# EAGLE board DC30_Cnet_Cow-A-Bunga_SAO (EAGLE 9.6.2)
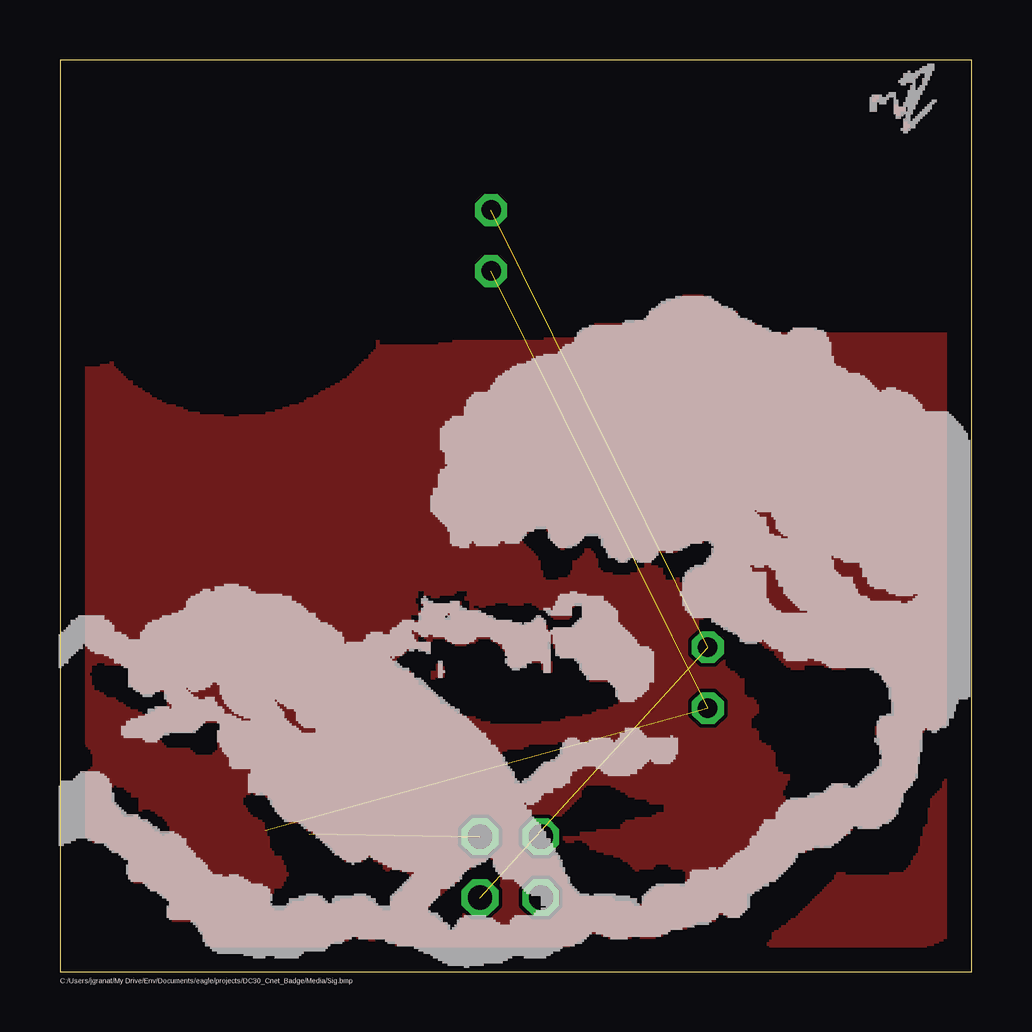
[diagram p0: board, top side]
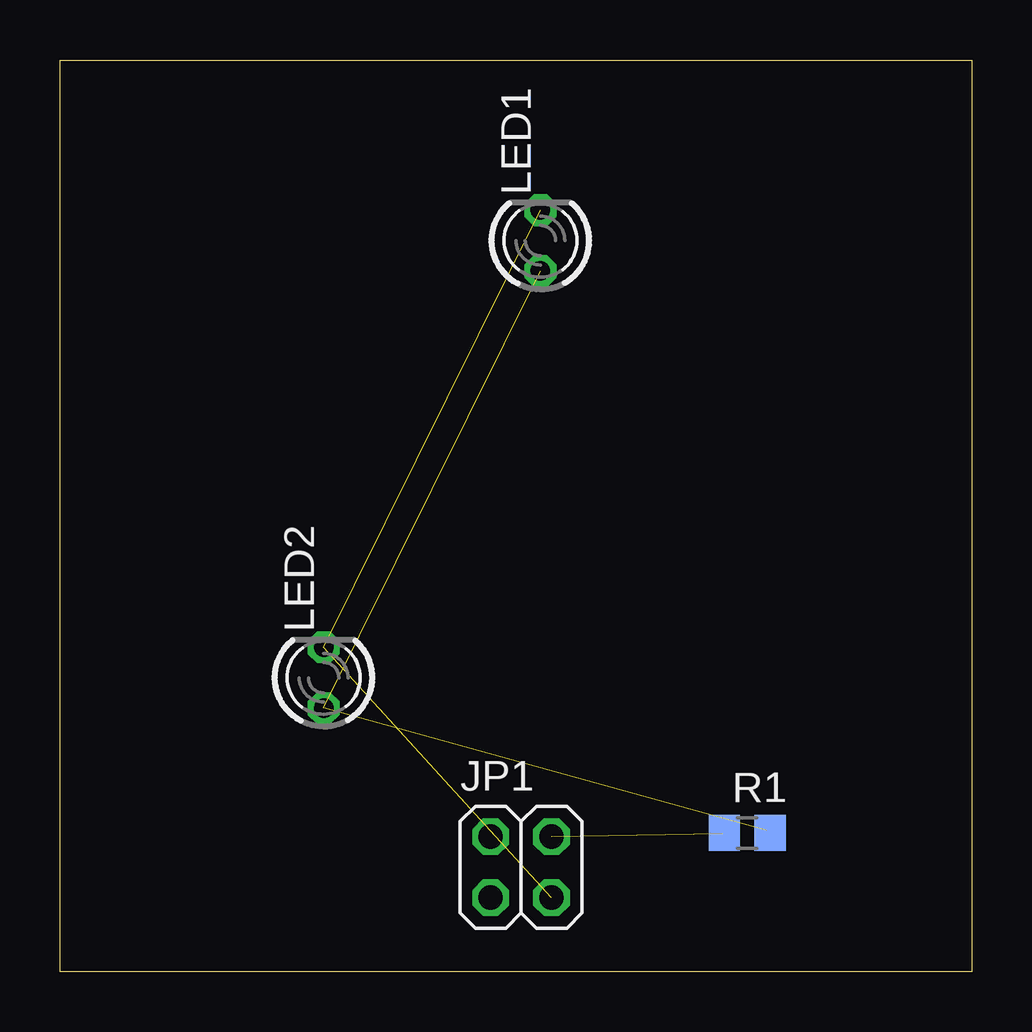
[diagram p1: board, bottom side, seen from below]

Size 38 x 38 mm. Coordinates in mm from the lower left corner, seen from the top.
Outline: 0,0 38,0 38,38 0,38 0,0
Copper layers (1*16): Top 0.035mm / dielectric 1.5mm / Bottom 0.035mm
Design rules "default": minimum track width 6mil, minimum drill 0.35mm, track to track 6mil, track to pad 6mil, pad to pad 6mil, via to via 6mil, smd to smd 6mil, copper to edge 40mil, drill to drill 6mil, minimum pad ring 10mil, minimum via ring 8mil, stop-mask expansion 4mil, vias tented up to drill 0mil, thermal gap 10mil
tRestrict: area 16.5,10.8 to 17.2,10.9; area 16.4,10.8 to 17.6,10.9; area 16.2,10.9 to 18.6,11.1; area 16.1,11.1 to 19.4,11.2; area 15.9,11.1 to 19.9,11.2; area 15.9,11.2 to 17.4,11.4; area 17.6,11.2 to 20.1,11.4; area 15.8,11.3 to 17.2,11.4; area 17.6,11.3 to 20.2,11.4; area 15.6,11.4 to 17.2,11.6; area 17.8,11.4 to 20.6,11.6; area 15.6,11.6 to 17.1,11.7; 1248 more areas
bRestrict: area 16.5,10.8 to 17.2,10.9; area 16.4,10.8 to 17.6,10.9; area 16.2,10.9 to 18.6,11.1; area 16.1,11.1 to 19.4,11.2; area 15.9,11.1 to 19.9,11.2; area 15.9,11.2 to 17.4,11.4; area 17.6,11.2 to 20.1,11.4; area 15.8,11.3 to 17.2,11.4; area 17.6,11.3 to 20.2,11.4; area 15.6,11.4 to 17.2,11.6; area 17.8,11.4 to 20.6,11.6; area 15.6,11.6 to 17.1,11.7; 190 more areas

## Footprints (pad centres in the part's own frame; a part is rotated, then mirrored left to right if it is on the bottom)
2X02 = drill 1.016 octagon: 1 -1.27,-1.27; 2 -1.27,1.27; 3 1.27,-1.27; 4 1.27,1.27
LED3MM = drill 0.813 octagon: A -1.27,0; K 1.27,0
R0805 = smd 1.3 x 1.5: 1 -0.95,0; 2 0.95,0

## Placement (x,y rotation side)
JP1  [2X02]  18.78,4.35 0 bottom
LED1  [LED3MM]  17.97,30.47 90 bottom
LED2  [LED3MM]  27.01,12.25 90 bottom
R1  [R0805]  9.35,5.78 0 bottom

## Library data of the parts
JP1 = pinhead
LED1 LED2 = led
R1 = rcl; SPICEPREFIX: R

## Nets
N$1: JP1.3 LED1.K LED2.K
N$2: JP1.4 R1.1
N$4: LED1.A LED2.A R1.2

## Tracks (layer width: path | path; a pad name or v marks a point on that pad's centre or on a via)
GND
  pour Top: 0,0 0,38 38,38 38,0
N$1  (2 unrouted)
N$2  (1 unrouted)
  Bottom 0.152: 10.38,5.74 R1.1
N$4  (2 unrouted)
  Bottom 0.152: 8.4,5.89 R1.2 8.55,5.89

## Text on the board
tPlace: C:/Users/jgranat/My Drive/Env/Documents/eagle/projects/DC30_Cnet_Badge/Media/Sig.bmp